# Altium PCB heart.PcbDoc (part 5 of 8)
Units mil, origin at the board's own origin, x right, y up, seen from the top; angles counter-clockwise.
Board outline 5000 x 6000 mil, 2 copper layers (Top Layer, Bottom Layer); 76 components, 43 nets, 328 pads, 50 vias.
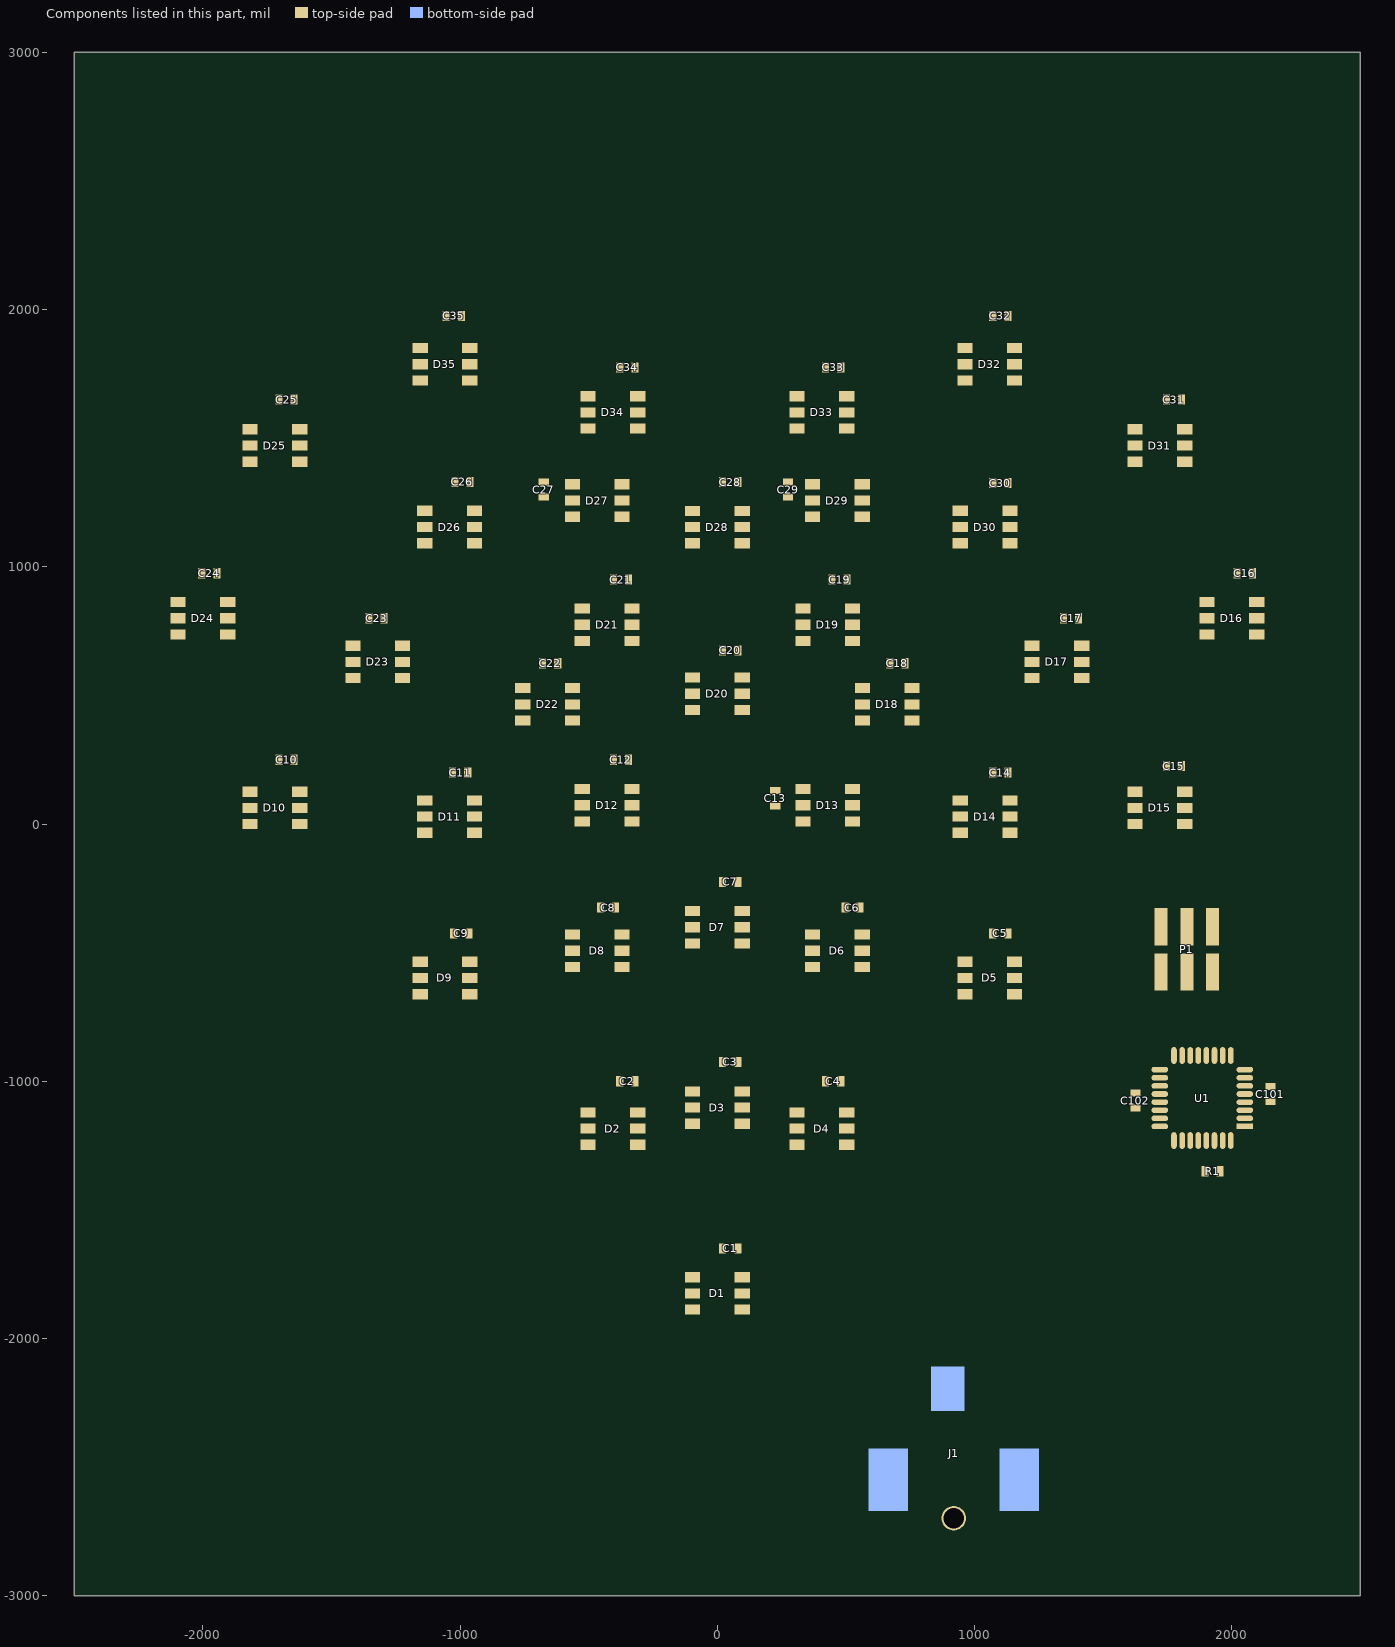
[diagram p5: the components of this part, seen from the top]

## Via types
v1: diameter 48, hole 20, Top Layer to Bottom Layer, 46 vias
v2: diameter 165, hole 150, Top Layer to Bottom Layer, 4 vias

## Nets (pads, with @x,y where several pads share a name; then routed paths per layer and width w, separated by ;. In a path a pad name is that pad's centre, name@x,y a point inside that pad or via, vN(x,y) a via of type N, cw(c..) or ccw(c..) an arc to the next point about the centre after c; other vN are vias at no path point) (continued)
copper on no net: (continued)
  Bottom Layer w2.65: -1566.24,-1541.63 -1462.69,-1541.63 ; -1566.24,-1538.97 -1462.69,-1538.97 ; -1566.24,-1536.32 -1462.69,-1536.32 ; -1566.24,-1408.88 -1486.59,-1408.88 ; -1563.58,-2170.87 -1534.38,-2170.87 ; -1563.58,-2019.53 -1526.41,-2019.53 ; -1563.58,-2016.88 -1526.41,-2016.88 ; -1563.58,-2014.22 -1526.41,-2014.22 ; -1563.58,-2011.57 -1526.41,-2011.57 ; -1563.58,-2008.91 -1529.07,-2008.91 ; -1563.58,-2006.26 -1529.07,-2006.26 ; -1563.58,-2003.6 -1529.07,-2003.6 ; -1563.58,-2000.95 -1529.07,-2000.95 ; -1563.58,-1998.29 -1531.72,-1998.29 ; -1563.58,-1995.64 -1531.72,-1995.64 ; -1563.58,-1804.48 -1462.69,-1804.48 ; -1560.93,-1894.75 -1531.72,-1894.75 ; -1560.93,-1262.85 -1515.79,-1262.85 ; -1558.27,-2173.53 -1529.07,-2173.53 ; -1558.27,-1807.13 -1460.04,-1807.13 ; -1558.27,-1398.26 -1550.31,-1398.26 ; -1555.62,-2069.98 -1518.45,-2069.98 ; -1555.62,-1961.12 -1385.7,-1961.12 ; -1555.62,-1897.4 -1531.72,-1897.4 ; -1555.62,-1809.79 -1460.04,-1809.79 ; -1555.62,-1260.2 -1505.17,-1260.2 ; -1552.96,-2176.18 -1523.76,-2176.18 ; -1552.96,-1900.06 -1531.72,-1900.06 ; -1552.96,-1812.44 -1457.38,-1812.44 ; -1552.96,-1257.54 -1452.07,-1257.54 ; -1550.31,-1815.1 -1457.38,-1815.1 ; -1550.31,-1284.09 -1457.38,-1284.09 ; -1550.31,-1254.89 -1539.69,-1254.89 ; -1547.65,-2178.84 -1515.79,-2178.84 ; -1547.65,-1963.78 -1388.35,-1963.78 ; -1547.65,-1252.23 -1539.69,-1252.23 ; -1545,-2210.7 -1539.69,-2210.7 ; -1545,-2208.04 -1537.03,-2208.04 ; -1545,-2205.39 -1537.03,-2205.39 ; -1545,-2202.73 -1534.38,-2202.73 ; -1545,-2200.08 -1534.38,-2200.08 ; -1545,-2197.42 -1531.72,-2197.42 ; -1545,-2194.77 -1529.07,-2194.77 ; -1545,-2192.11 -1526.41,-2192.11 ; -1545,-2067.32 -1515.79,-2067.32 ; -1545,-1902.71 -1534.38,-1902.71 ; -1545,-1817.75 -1454.73,-1817.75 ; -1545,-1281.44 -1457.38,-1281.44 ; -1545,-1249.58 -1539.69,-1249.58 ; -1545,-1246.92 -1537.03,-1246.92 ; -1545,-1212.41 -1375.08,-1212.41 ; -1542.34,-2216.01 -1539.69,-2216.01 ; -1542.34,-2213.35 -1539.69,-2213.35 ; -1542.34,-2189.46 -1462.69,-2189.46 ; -1542.34,-2186.8 -1457.38,-2186.8 ; -1542.34,-2184.15 -1452.07,-2184.15 ; -1542.34,-2181.49 -1505.17,-2181.49 ; -1542.34,-2064.67 -1510.48,-2064.67 ; -1542.34,-1966.43 -1388.35,-1966.43 ; -1542.34,-1820.41 -1454.73,-1820.41 ; -1542.34,-1406.22 -1486.59,-1406.22 ; -1542.34,-1244.27 -1537.03,-1244.27 ; -1539.69,-2218.66 -1537.03,-2218.66 ; -1539.69,-1969.09 -1391.01,-1969.09 ; -1539.69,-1823.06 -1452.07,-1823.06 ; -1539.69,-1554.9 -1457.38,-1554.9 ; -1539.69,-1384.98 -1531.72,-1384.98 ; -1539.69,-1241.61 -1537.03,-1241.61 ; -1537.03,-2062.01 -1505.17,-2062.01 ; -1537.03,-1825.72 -1452.07,-1825.72 ; -1537.03,-1403.57 -1489.24,-1403.57 ; -1537.03,-1382.33 -1531.72,-1382.33 ; -1537.03,-1278.78 -1460.04,-1278.78 ; -1537.03,-1254.89 -1454.73,-1254.89 ; -1537.03,-1215.06 -1369.77,-1215.06 ; -1534.38,-1971.74 -1391.01,-1971.74 ; -1534.38,-1379.67 -1531.72,-1379.67 ; -1534.38,-1217.72 -1353.84,-1217.72 ; -1531.72,-2059.36 -1494.55,-2059.36 ; -1531.72,-1974.4 -1393.66,-1974.4 ; -1531.72,-1828.37 -1449.42,-1828.37 ; -1531.72,-1400.91 -1489.24,-1400.91 ; -1529.07,-2056.7 -1329.94,-2056.7 ; -1529.07,-1977.05 -1393.66,-1977.05 ; -1529.07,-1831.03 -1446.76,-1831.03 ; -1529.07,-1398.26 -1489.24,-1398.26 ; -1529.07,-1395.6 -1489.24,-1395.6 ; -1529.07,-1276.13 -1462.69,-1276.13 ; -1529.07,-1223.03 -1351.18,-1223.03 ; -1529.07,-1220.37 -1353.84,-1220.37 ; -1526.41,-2115.11 -1513.14,-2115.11 ; -1526.41,-2112.46 -1513.14,-2112.46 ; -1526.41,-2109.8 -1515.79,-2109.8 ; -1526.41,-2107.15 -1515.79,-2107.15 ; -1526.41,-2104.49 -1515.79,-2104.49 ; -1526.41,-2101.84 -1515.79,-2101.84 ; -1526.41,-2099.18 -1513.14,-2099.18 ; -1526.41,-2096.53 -1513.14,-2096.53 ; -1526.41,-2093.87 -1510.48,-2093.87 ; -1526.41,-2054.05 -1319.32,-2054.05 ; -1526.41,-1979.71 -1396.32,-1979.71 ; -1526.41,-1833.68 -1446.76,-1833.68 ; -1526.41,-1392.95 -1489.24,-1392.95 ; -1526.41,-1252.23 -1460.04,-1252.23 ; -1526.41,-1241.61 -1523.76,-1241.61 ; -1526.41,-1238.96 -1513.14,-1238.96 ; -1526.41,-1236.3 -1353.84,-1236.3 ; -1526.41,-1233.65 -1353.84,-1233.65 ; -1526.41,-1230.99 -1351.18,-1230.99 ; -1526.41,-1228.34 -1351.18,-1228.34 ; -1526.41,-1225.68 -1351.18,-1225.68 ; -1523.76,-2120.42 -1510.48,-2120.42 ; -1523.76,-2117.77 -1510.48,-2117.77 ; -1523.76,-2091.22 -1510.48,-2091.22 ; -1523.76,-2088.56 -1507.83,-2088.56 ; -1523.76,-2051.39 -1306.05,-2051.39 ; -1523.76,-1982.36 -1396.32,-1982.36 ; -1523.76,-1836.34 -1444.11,-1836.34 ; -1523.76,-1390.29 -1489.24,-1390.29 ; -1523.76,-1387.64 -1489.24,-1387.64 ; -1521.1,-2123.08 -1505.17,-2123.08 ; -1521.1,-2085.91 -1502.52,-2085.91 ; -1521.1,-2083.25 -1497.21,-2083.25 ; -1521.1,-2048.74 -1290.12,-2048.74 ; -1521.1,-2046.08 -1276.84,-2046.08 ; -1521.1,-1985.02 -1396.32,-1985.02 ; -1521.1,-1273.47 -1468,-1273.47 ; -1518.45,-2231.94 -1441.45,-2231.94 ; -1518.45,-2192.11 -1468,-2192.11 ; -1518.45,-2125.73 -1502.52,-2125.73 ; -1518.45,-2080.6 -1446.76,-2080.6 ; -1518.45,-2043.43 -1268.88,-2043.43 ; -1518.45,-1990.33 -1396.32,-1990.33 ; -1518.45,-1987.67 -1396.32,-1987.67 ; -1518.45,-1838.99 -1444.11,-1838.99 ; -1518.45,-1249.58 -1468,-1249.58 ; -1515.79,-2040.77 -1263.57,-2040.77 ; -1515.79,-2038.12 -1258.26,-2038.12 ; -1515.79,-1995.64 -1396.32,-1995.64 ; -1515.79,-1992.98 -1396.32,-1992.98 ; -1515.79,-1915.99 -1425.52,-1915.99 ; -1515.79,-1841.65 -1441.45,-1841.65 ; -1515.79,-1315.95 -1507.83,-1315.95 ; -1515.79,-1313.3 -1510.48,-1313.3 ; -1515.79,-1310.64 -1513.14,-1310.64 ; -1513.14,-2128.39 -1481.28,-2128.39 ; -1513.14,-2077.94 -1452.07,-2077.94 ; -1513.14,-2035.46 -1252.95,-2035.46 ; -1513.14,-2032.81 -1250.29,-2032.81 ; -1513.14,-2030.15 -1247.64,-2030.15 ; -1513.14,-2027.5 -1244.98,-2027.5 ; -1513.14,-2006.26 -1391.01,-2006.26 ; -1513.14,-2003.6 -1393.66,-2003.6 ; -1513.14,-2000.95 -1393.66,-2000.95 ; -1513.14,-1998.29 -1393.66,-1998.29 ; -1513.14,-1844.3 -1438.8,-1844.3 ; -1513.14,-1557.56 -1457.38,-1557.56 ; -1513.14,-1321.26 -1499.86,-1321.26 ; -1513.14,-1318.61 -1505.17,-1318.61 ; -1510.48,-2131.04 -1486.59,-2131.04 ; -1510.48,-2075.29 -1454.73,-2075.29 ; -1510.48,-2024.84 -1369.77,-2024.84 ; -1510.48,-2022.19 -1375.08,-2022.19 ; -1510.48,-2019.53 -1380.39,-2019.53 ; -1510.48,-2016.88 -1383.04,-2016.88 ; -1510.48,-2014.22 -1385.7,-2014.22 ; -1510.48,-2011.57 -1388.35,-2011.57 ; -1510.48,-2008.91 -1391.01,-2008.91 ; -1510.48,-1913.33 -1430.83,-1913.33 ; -1510.48,-1862.89 -1505.17,-1862.89 ; -1510.48,-1323.92 -1497.21,-1323.92 ; -1510.48,-1270.82 -1473.31,-1270.82 ; -1507.83,-2194.77 -1470.66,-2194.77 ; -1507.83,-2072.63 -1460.04,-2072.63 ; -1507.83,-1910.68 -1436.14,-1910.68 ; -1507.83,-1908.02 -1441.45,-1908.02 ; -1507.83,-1870.85 -1494.55,-1870.85 ; -1507.83,-1868.2 -1499.86,-1868.2 ; -1507.83,-1865.54 -1502.52,-1865.54 ; -1507.83,-1846.96 -1438.8,-1846.96 ; -1507.83,-1329.23 -1446.76,-1329.23 ; -1507.83,-1326.57 -1489.24,-1326.57 ; -1505.17,-2112.46 -1449.42,-2112.46 ; -1505.17,-2109.8 -1452.07,-2109.8 ; -1505.17,-2107.15 -1452.07,-2107.15 ; -1505.17,-2104.49 -1454.73,-2104.49 ; -1505.17,-2101.84 -1457.38,-2101.84 ; -1505.17,-2099.18 -1460.04,-2099.18 ; -1505.17,-1905.37 -1446.76,-1905.37 ; -1505.17,-1902.71 -1449.42,-1902.71 ; -1505.17,-1900.06 -1454.73,-1900.06 ; -1505.17,-1884.13 -1478.62,-1884.13 ; -1505.17,-1881.47 -1481.28,-1881.47 ; -1505.17,-1878.82 -1483.93,-1878.82 ; -1505.17,-1876.16 -1489.24,-1876.16 ; -1505.17,-1873.51 -1491.9,-1873.51 ; -1505.17,-1849.61 -1436.14,-1849.61 ; -1505.17,-1246.92 -1478.62,-1246.92 ; -1502.52,-2197.42 -1470.66,-2197.42 ; -1502.52,-2133.7 -1494.55,-2133.7 ; -1502.52,-2115.11 -1478.62,-2115.11 ; -1502.52,-2096.53 -1462.69,-2096.53 ; -1502.52,-1897.4 -1457.38,-1897.4 ; -1502.52,-1894.75 -1462.69,-1894.75 ; -1502.52,-1892.09 -1465.35,-1892.09 ; -1502.52,-1889.44 -1470.66,-1889.44 ; -1502.52,-1886.78 -1473.31,-1886.78 ; -1502.52,-1852.27 -1433.49,-1852.27 ; -1502.52,-1331.88 -1449.42,-1331.88 ; -1499.86,-2093.87 -1468,-2093.87 ; -1499.86,-2069.98 -1468,-2069.98 ; -1499.86,-1854.92 -1433.49,-1854.92 ; -1499.86,-1334.54 -1452.07,-1334.54 ; -1497.21,-2200.08 -1462.69,-2200.08 ; -1497.21,-2117.77 -1483.93,-2117.77 ; -1497.21,-1560.21 -1454.73,-1560.21 ; -1494.55,-1857.58 -1430.83,-1857.58 ; -1494.55,-1337.19 -1457.38,-1337.19 ; -1491.9,-2202.73 -1454.73,-2202.73 ; -1491.9,-2091.22 -1475.97,-2091.22 ; -1491.9,-1860.23 -1428.18,-1860.23 ; -1491.9,-1432.77 -1475.97,-1432.77 ; -1491.9,-1268.16 -1486.59,-1268.16 ; -1489.24,-1862.89 -1428.18,-1862.89 ; -1489.24,-1663.76 -1462.69,-1663.76 ; -1489.24,-1461.98 -1483.93,-1461.98 ; -1489.24,-1339.85 -1465.35,-1339.85 ; -1486.59,-2205.39 -1446.76,-2205.39 ; -1486.59,-1865.54 -1425.52,-1865.54 ; -1486.59,-1661.11 -1457.38,-1661.11 ; -1486.59,-1562.87 -1454.73,-1562.87 ; -1486.59,-1459.32 -1478.62,-1459.32 ; -1486.59,-1435.43 -1475.97,-1435.43 ; -1483.93,-1456.67 -1475.97,-1456.67 ; -1483.93,-1454.01 -1473.31,-1454.01 ; -1483.93,-1440.74 -1473.31,-1440.74 ; -1483.93,-1438.08 -1473.31,-1438.08 ; -1481.28,-1868.2 -1422.87,-1868.2 ; -1481.28,-1666.42 -1470.66,-1666.42 ; -1481.28,-1602.69 -1457.38,-1602.69 ; -1481.28,-1451.36 -1473.31,-1451.36 ; -1481.28,-1448.7 -1470.66,-1448.7 ; -1481.28,-1446.05 -1470.66,-1446.05 ; -1481.28,-1443.39 -1473.31,-1443.39 ; -1478.62,-2208.04 -1441.45,-2208.04 ; -1478.62,-2181.49 -1449.42,-2181.49 ; -1478.62,-1870.85 -1422.87,-1870.85 ; -1478.62,-1658.45 -1454.73,-1658.45 ; -1478.62,-1565.52 -1452.07,-1565.52 ; -1475.97,-1873.51 -1420.21,-1873.51 ; -1475.97,-1605.35 -1454.73,-1605.35 ; -1475.97,-1260.2 -1446.76,-1260.2 ; -1473.31,-2059.36 -1340.56,-2059.36 ; -1473.31,-1655.8 -1452.07,-1655.8 ; -1473.31,-1608 -1452.07,-1608 ; -1473.31,-1568.18 -1449.42,-1568.18 ; -1473.31,-1472.6 -1436.14,-1472.6 ; -1470.66,-2210.7 -1433.49,-2210.7 ; -1470.66,-2178.84 -1446.76,-2178.84 ; -1470.66,-2083.25 -1444.11,-2083.25 ; -1470.66,-1876.16 -1417.56,-1876.16 ; -1470.66,-1653.14 -1449.42,-1653.14 ; -1470.66,-1610.66 -1452.07,-1610.66 ; -1470.66,-1238.96 -1353.84,-1238.96 ; -1468,-2125.73 -1446.76,-2125.73 ; -1468,-2123.08 -1446.76,-2123.08 ; -1468,-2117.77 -1446.76,-2117.77 ; -1468,-2115.11 -1449.42,-2115.11 ; -1468,-1878.82 -1417.56,-1878.82 ; -1468,-1685 -865.31,-1685 ; -1468,-1650.49 -1446.76,-1650.49 ; -1468,-1613.31 -1449.42,-1613.31 ; -1468,-1469.94 -1436.14,-1469.94 ; -1468,-1403.57 -1401.63,-1403.57 ; -1468,-1400.91 -1404.28,-1400.91 ; -1468,-1398.26 -1404.28,-1398.26 ; -1468,-1395.6 -1404.28,-1395.6 ; -1468,-1392.95 -1404.28,-1392.95 ; -1468,-1326.57 -1444.11,-1326.57 ; -1468,-1262.85 -1444.11,-1262.85 ; -1465.35,-2213.35 -1425.52,-2213.35 ; -1465.35,-2176.18 -1444.11,-2176.18 ; -1465.35,-2120.42 -1446.76,-2120.42 ; -1465.35,-2085.91 -1441.45,-2085.91 ; -1465.35,-1881.47 -1414.9,-1881.47 ; -1465.35,-1647.83 -1446.76,-1647.83 ; -1465.35,-1645.18 -1444.11,-1645.18 ; -1465.35,-1618.62 -1446.76,-1618.62 ; -1465.35,-1615.97 -1446.76,-1615.97 ; -1465.35,-1570.83 -1446.76,-1570.83 ; -1465.35,-1467.29 -1436.14,-1467.29 ; -1465.35,-1411.53 -1396.32,-1411.53 ; -1465.35,-1408.88 -1398.97,-1408.88 ; -1465.35,-1406.22 -1401.63,-1406.22 ; -1465.35,-1390.29 -1404.28,-1390.29 ; -1465.35,-1387.64 -1401.63,-1387.64 ; -1462.69,-2062.01 -1345.87,-2062.01 ; -1462.69,-1642.52 -1444.11,-1642.52 ; -1462.69,-1639.86 -1444.11,-1639.86 ; -1462.69,-1637.21 -1444.11,-1637.21 ; -1462.69,-1634.55 -1444.11,-1634.55 ; -1462.69,-1629.24 -1444.11,-1629.24 ; -1462.69,-1626.59 -1444.11,-1626.59 ; -1462.69,-1623.93 -1444.11,-1623.93 ; -1462.69,-1621.28 -1446.76,-1621.28 ; -1462.69,-1464.63 -1436.14,-1464.63 ; -1462.69,-1416.84 -1380.39,-1416.84 ; -1462.69,-1414.19 -1388.35,-1414.19 ; -1462.69,-1265.51 -1444.11,-1265.51 ; -1462.69,-1241.61 -1356.49,-1241.61 ; -1460.04,-2173.53 -1441.45,-2173.53 ; -1460.04,-2088.56 -1438.8,-2088.56 ; -1460.04,-1884.13 -1412.25,-1884.13 ; -1460.04,-1631.9 -1444.11,-1631.9 ; -1460.04,-1573.49 -1441.45,-1573.49 ; -1460.04,-1461.98 -1436.14,-1461.98 ; -1460.04,-1459.32 -1433.49,-1459.32 ; -1460.04,-1424.81 -1385.7,-1424.81 ; -1460.04,-1422.15 -1383.04,-1422.15 ; -1460.04,-1419.5 -1380.39,-1419.5 ; -1460.04,-1323.92 -1441.45,-1323.92 ; -1460.04,-1268.16 -1441.45,-1268.16 ; -1457.38,-2216.01 -1417.56,-2216.01 ; -1457.38,-2170.87 -1438.8,-2170.87 ; -1457.38,-2064.67 -1351.18,-2064.67 ; -1457.38,-1886.78 -1409.59,-1886.78 ; -1457.38,-1682.35 -854.69,-1682.35 ; -1457.38,-1576.14 -1438.8,-1576.14 ; -1457.38,-1456.67 -1433.49,-1456.67 ; -1457.38,-1454.01 -1433.49,-1454.01 ; -1457.38,-1451.36 -1430.83,-1451.36 ; -1457.38,-1435.43 -1417.56,-1435.43 ; -1457.38,-1432.77 -1412.25,-1432.77 ; -1457.38,-1430.12 -1404.28,-1430.12 ; -1457.38,-1427.46 -1393.66,-1427.46 ; -1457.38,-1321.26 -1438.8,-1321.26 ; -1454.73,-2168.22 -1436.14,-2168.22 ; -1454.73,-2091.22 -1436.14,-2091.22 ; -1454.73,-1743.41 -1053.82,-1743.41 ; -1454.73,-1448.7 -1430.83,-1448.7 ; -1454.73,-1446.05 -1428.18,-1446.05 ; -1454.73,-1443.39 -1425.52,-1443.39 ; -1454.73,-1440.74 -1422.87,-1440.74 ; -1454.73,-1438.08 -1420.21,-1438.08 ; -1454.73,-1318.61 -1438.8,-1318.61 ; -1454.73,-1270.82 -1438.8,-1270.82 ; -1454.73,-1244.27 -1356.49,-1244.27 ; -1452.07,-2165.56 -1433.49,-2165.56 ; -1452.07,-2093.87 -1409.59,-2093.87 ; -1452.07,-2067.32 -1353.84,-2067.32 ; -1452.07,-1889.44 -1409.59,-1889.44 ; -1452.07,-1746.07 -1053.82,-1746.07 ; -1452.07,-1578.8 -1430.83,-1578.8 ; -1452.07,-1315.95 -1436.14,-1315.95 ; -1452.07,-1276.13 -1436.14,-1276.13 ; -1452.07,-1273.47 -1436.14,-1273.47 ; -1452.07,-1246.92 -1359.15,-1246.92 ; -1449.42,-2218.66 -1409.59,-2218.66 ; -1449.42,-2162.91 -1433.49,-2162.91 ; -1449.42,-2096.53 -1404.28,-2096.53 ; -1449.42,-1892.09 -1406.94,-1892.09 ; -1449.42,-1679.69 -846.73,-1679.69 ; -1449.42,-1581.45 -1420.21,-1581.45 ; -1449.42,-1313.3 -1436.14,-1313.3 ; -1449.42,-1310.64 -1433.49,-1310.64 ; -1449.42,-1278.78 -1436.14,-1278.78 ; -1446.76,-2160.25 -1430.83,-2160.25 ; -1446.76,-2099.18 -1401.63,-2099.18 ; -1446.76,-2069.98 -1359.15,-2069.98 ; -1446.76,-1748.72 -1056.47,-1748.72 ; -1446.76,-1677.04 -1314.01,-1677.04 ; -1446.76,-1584.11 -1372.42,-1584.11 ; -1446.76,-1307.99 -1433.49,-1307.99 ; -1446.76,-1305.33 -1433.49,-1305.33 ; -1446.76,-1302.68 -1430.83,-1302.68 ; -1446.76,-1286.75 -1409.59,-1286.75 ; -1446.76,-1284.09 -1430.83,-1284.09 ; -1446.76,-1281.44 -1433.49,-1281.44 ; -1446.76,-1249.58 -1359.15,-1249.58 ; -1444.11,-2221.32 -1401.63,-2221.32 ; -1444.11,-2157.6 -1430.83,-2157.6 ; -1444.11,-2154.94 -1428.18,-2154.94 ; -1444.11,-2104.49 -1420.21,-2104.49 ; -1444.11,-2101.84 -1401.63,-2101.84 ; -1444.11,-2072.63 -1361.8,-2072.63 ; -1444.11,-1894.75 -1404.28,-1894.75 ; -1444.11,-1769.96 -1438.8,-1769.96 ; -1444.11,-1767.31 -1441.45,-1767.31 ; -1444.11,-1751.38 -1056.47,-1751.38 ; -1444.11,-1586.76 -1372.42,-1586.76 ; -1444.11,-1538.97 -1438.8,-1538.97 ; -1444.11,-1536.32 -1438.8,-1536.32 ; -1444.11,-1300.02 -1428.18,-1300.02 ; -1444.11,-1297.37 -1422.87,-1297.37 ; -1444.11,-1294.71 -1417.56,-1294.71 ; -1444.11,-1292.06 -1412.25,-1292.06 ; -1444.11,-1289.4 -1409.59,-1289.4 ; -1444.11,-1252.23 -1361.8,-1252.23 ; -1441.45,-2152.28 -1428.18,-2152.28 ; -1441.45,-2149.63 -1428.18,-2149.63 ; -1441.45,-2109.8 -1425.52,-2109.8 ; -1441.45,-2107.15 -1422.87,-2107.15 ; -1441.45,-1777.93 -1430.83,-1777.93 ; -1441.45,-1775.27 -1433.49,-1775.27 ; -1441.45,-1772.62 -1436.14,-1772.62 ; -1441.45,-1754.03 -1056.47,-1754.03 ; -1441.45,-1674.38 -1329.94,-1674.38 ; -1441.45,-1589.42 -1375.08,-1589.42 ; -1441.45,-1533.66 -1436.14,-1533.66 ; -1441.45,-1531.01 -1436.14,-1531.01 ; -1441.45,-1528.35 -1433.49,-1528.35 ; -1441.45,-1525.7 -1430.83,-1525.7 ; -1441.45,-1523.04 -1425.52,-1523.04 ; -1441.45,-1254.89 -1420.21,-1254.89 ; -1438.8,-2146.97 -1425.52,-2146.97 ; -1438.8,-2144.32 -1425.52,-2144.32 ; -1438.8,-2141.66 -1425.52,-2141.66 ; -1438.8,-2139.01 -1425.52,-2139.01 ; -1438.8,-2120.42 -1422.87,-2120.42 ; -1438.8,-2117.77 -1425.52,-2117.77 ; -1438.8,-2115.11 -1425.52,-2115.11 ; -1438.8,-2112.46 -1425.52,-2112.46 ; -1438.8,-2075.29 -1364.46,-2075.29 ; -1438.8,-1897.4 -1401.63,-1897.4 ; -1438.8,-1783.24 -1422.87,-1783.24 ; -1438.8,-1780.58 -1425.52,-1780.58 ; -1438.8,-1756.69 -1056.47,-1756.69 ; -1438.8,-1671.73 -1335.25,-1671.73 ; -1438.8,-1520.39 -1417.56,-1520.39 ; -1438.8,-1517.73 -1314.01,-1517.73 ; -1438.8,-1257.54 -1422.87,-1257.54 ; -1436.14,-2223.97 -1393.66,-2223.97 ; -1436.14,-2136.35 -1422.87,-2136.35 ; -1436.14,-2133.7 -1422.87,-2133.7 ; -1436.14,-2131.04 -1422.87,-2131.04 ; -1436.14,-2128.39 -1422.87,-2128.39 ; -1436.14,-2125.73 -1422.87,-2125.73 ; -1436.14,-2123.08 -1422.87,-2123.08 ; -1436.14,-2077.94 -1367.11,-2077.94 ; -1436.14,-1900.06 -1401.63,-1900.06 ; -1436.14,-1791.2 -1412.25,-1791.2 ; -1436.14,-1788.55 -1417.56,-1788.55 ; -1436.14,-1785.89 -1420.21,-1785.89 ; -1436.14,-1669.07 -1340.56,-1669.07 ; -1436.14,-1594.73 -1375.08,-1594.73 ; -1436.14,-1592.07 -1375.08,-1592.07 ; -1436.14,-1515.08 -1316.67,-1515.08 ; -1436.14,-1260.2 -1422.87,-1260.2 ; -1433.49,-2080.6 -1369.77,-2080.6 ; -1433.49,-1796.51 -1406.94,-1796.51 ; -1433.49,-1793.86 -1409.59,-1793.86 ; -1433.49,-1759.34 -1205.16,-1759.34 ; -1433.49,-1666.42 -1345.87,-1666.42 ; -1433.49,-1597.38 -1377.73,-1597.38 ; -1433.49,-1512.42 -1319.32,-1512.42 ; -1433.49,-1262.85 -1422.87,-1262.85 ; -1430.83,-1902.71 -1398.97,-1902.71 ; -1430.83,-1801.82 -1398.97,-1801.82 ; -1430.83,-1799.17 -1404.28,-1799.17 ; -1430.83,-1762 -1290.12,-1762 ; -1430.83,-1663.76 -1351.18,-1663.76 ; -1430.83,-1661.11 -1353.84,-1661.11 ; -1430.83,-1602.69 -1377.73,-1602.69 ; -1430.83,-1600.04 -1377.73,-1600.04 ; -1430.83,-1509.77 -1321.98,-1509.77 ; -1430.83,-1268.16 -1417.56,-1268.16 ; -1430.83,-1265.51 -1420.21,-1265.51 ; -1428.18,-2226.63 -1383.04,-2226.63 ; -1428.18,-1807.13 -1393.66,-1807.13 ; -1428.18,-1804.48 -1396.32,-1804.48 ; -1428.18,-1764.65 -1292.77,-1764.65 ; -1428.18,-1658.45 -1356.49,-1658.45 ; -1428.18,-1608 -1377.73,-1608 ; -1428.18,-1605.35 -1377.73,-1605.35 ; -1428.18,-1273.47 -1417.56,-1273.47 ; -1428.18,-1270.82 -1417.56,-1270.82 ; -1425.52,-2229.28 -1372.42,-2229.28 ; -1425.52,-2091.22 -1417.56,-2091.22 ; -1425.52,-1905.37 -1396.32,-1905.37 ; -1425.52,-1812.44 -1388.35,-1812.44 ; -1425.52,-1809.79 -1391.01,-1809.79 ; -1425.52,-1767.31 -1295.43,-1767.31 ; -1425.52,-1655.8 -1359.15,-1655.8 ; -1425.52,-1653.14 -1361.8,-1653.14 ; -1425.52,-1650.49 -1364.46,-1650.49 ; -1425.52,-1613.31 -1377.73,-1613.31 ; -1425.52,-1610.66 -1377.73,-1610.66 ; -1425.52,-1507.11 -1327.29,-1507.11 ; -1422.87,-1817.75 -1380.39,-1817.75 ; -1422.87,-1815.1 -1383.04,-1815.1 ; -1422.87,-1647.83 -1364.46,-1647.83 ; -1422.87,-1645.18 -1367.11,-1645.18 ; -1422.87,-1642.52 -1367.11,-1642.52 ; -1422.87,-1639.86 -1369.77,-1639.86 ; -1422.87,-1637.21 -1369.77,-1637.21 ; -1422.87,-1634.55 -1372.42,-1634.55 ; -1422.87,-1631.9 -1372.42,-1631.9 ; -1422.87,-1629.24 -1372.42,-1629.24 ; -1422.87,-1626.59 -1375.08,-1626.59 ; -1422.87,-1623.93 -1375.08,-1623.93 ; -1422.87,-1621.28 -1375.08,-1621.28 ; -1422.87,-1618.62 -1375.08,-1618.62 ; -1422.87,-1615.97 -1377.73,-1615.97 ; -1420.21,-2231.94 -1319.32,-2231.94 ; -1420.21,-1823.06 -1375.08,-1823.06 ; -1420.21,-1820.41 -1377.73,-1820.41 ; -1420.21,-1769.96 -1295.43,-1769.96 ; -1420.21,-1504.46 -1329.94,-1504.46 ; -1417.56,-2234.59 -1409.59,-2234.59 ; -1417.56,-1908.02 -1393.66,-1908.02 ; -1417.56,-1828.37 -1367.11,-1828.37 ; -1417.56,-1825.72 -1369.77,-1825.72 ; -1417.56,-1772.62 -1298.08,-1772.62 ; -1417.56,-1475.25 -1409.59,-1475.25 ; -1417.56,-1472.6 -1401.63,-1472.6 ; -1417.56,-1469.94 -1393.66,-1469.94 ; -1417.56,-1467.29 -1388.35,-1467.29 ; -1417.56,-1464.63 -1383.04,-1464.63 ; -1417.56,-1461.98 -1380.39,-1461.98 ; -1414.9,-2277.07 -1266.22,-2277.07 ; -1414.9,-2237.25 -1406.94,-2237.25 ; -1414.9,-2125.73 -1404.28,-2125.73 ; -1414.9,-2123.08 -1404.28,-2123.08 ; -1414.9,-2120.42 -1406.94,-2120.42 ; -1414.9,-2117.77 -1406.94,-2117.77 ; -1414.9,-2115.11 -1409.59,-2115.11 ; -1414.9,-2112.46 -1412.25,-2112.46 ; -1414.9,-1831.03 -1364.46,-1831.03 ; -1414.9,-1775.27 -1298.08,-1775.27 ; -1414.9,-1459.32 -1377.73,-1459.32 ; -1414.9,-1456.67 -1375.08,-1456.67 ; -1414.9,-1284.09 -1406.94,-1284.09 ; -1414.9,-1254.89 -1361.8,-1254.89 ; -1412.25,-2242.56 -1406.94,-2242.56 ; -1412.25,-2239.9 -1406.94,-2239.9 ; -1412.25,-1910.68 -1391.01,-1910.68 ; -1412.25,-1836.34 -1356.49,-1836.34 ; -1412.25,-1833.68 -1361.8,-1833.68 ; -1412.25,-1777.93 -1295.43,-1777.93 ; -1412.25,-1454.01 -1375.08,-1454.01 ; -1409.59,-2245.21 -1404.28,-2245.21 ; -1409.59,-2083.25 -1372.42,-2083.25 ; -1409.59,-1841.65 -1351.18,-1841.65 ; -1409.59,-1838.99 -1353.84,-1838.99 ; -1409.59,-1780.58 -1295.43,-1780.58 ; -1409.59,-1581.45 -1369.77,-1581.45 ; -1409.59,-1501.8 -1332.6,-1501.8 ; -1409.59,-1451.36 -1375.08,-1451.36 ; -1409.59,-1281.44 -1406.94,-1281.44 ; -1409.59,-1278.78 -1406.94,-1278.78 ; -1409.59,-1276.13 -1406.94,-1276.13 ; -1409.59,-1257.54 -1364.46,-1257.54 ; -1406.94,-2250.52 -1404.28,-2250.52 ; -1406.94,-2247.87 -1404.28,-2247.87 ; -1406.94,-2104.49 -1398.97,-2104.49 ; -1406.94,-1844.3 -1348.53,-1844.3 ; -1406.94,-1260.2 -1364.46,-1260.2 ; -1404.28,-2274.42 -1260.91,-2274.42 ; -1404.28,-2234.59 -1324.63,-2234.59 ; -1404.28,-2107.15 -1398.97,-2107.15 ; -1404.28,-2085.91 -1375.08,-2085.91 ; -1404.28,-1849.61 -1340.56,-1849.61 ; -1404.28,-1846.96 -1345.87,-1846.96 ; -1404.28,-1783.24 -1292.77,-1783.24 ; -1404.28,-1520.39 -1311.36,-1520.39 ; -1404.28,-1448.7 -1375.08,-1448.7 ; -1404.28,-1262.85 -1364.46,-1262.85 ; -1401.63,-2271.76 -1244.98,-2271.76 ; -1401.63,-2109.8 -1398.97,-2109.8 ; -1401.63,-2088.56 -1375.08,-2088.56 ; -1401.63,-1913.33 -1391.01,-1913.33 ; -1401.63,-1852.27 -1337.91,-1852.27 ; -1401.63,-1785.89 -1290.12,-1785.89 ; -1401.63,-1499.15 -1335.25,-1499.15 ; -1401.63,-1265.51 -1364.46,-1265.51 ; -1398.97,-2269.11 -1242.33,-2269.11 ; -1398.97,-2091.22 -1377.73,-2091.22 ; -1398.97,-1857.58 -1343.22,-1857.58 ; -1398.97,-1854.92 -1335.25,-1854.92 ; -1398.97,-1788.55 -1290.12,-1788.55 ; -1398.97,-1578.8 -1367.11,-1578.8 ; -1398.97,-1273.47 -1367.11,-1273.47 ; -1398.97,-1270.82 -1367.11,-1270.82 ; -1398.97,-1268.16 -1367.11,-1268.16 ; -1396.32,-2266.45 -1242.33,-2266.45 ; -1396.32,-2263.8 -1242.33,-2263.8 ; -1396.32,-2237.25 -1327.29,-2237.25 ; -1396.32,-2093.87 -1377.73,-2093.87 ; -1396.32,-1860.23 -1345.87,-1860.23 ; -1396.32,-1791.2 -1287.46,-1791.2 ; -1396.32,-1576.14 -1364.46,-1576.14 ; -1396.32,-1523.04 -1306.05,-1523.04 ; -1396.32,-1446.05 -1375.08,-1446.05 ; -1396.32,-1284.09 -1367.11,-1284.09 ; -1396.32,-1281.44 -1367.11,-1281.44 ; -1396.32,-1278.78 -1367.11,-1278.78 ; -1396.32,-1276.13 -1367.11,-1276.13 ; -1393.66,-2261.14 -1242.33,-2261.14 ; -1393.66,-2258.49 -1242.33,-2258.49 ; -1393.66,-2255.83 -1242.33,-2255.83 ; -1393.66,-2253.18 -1244.98,-2253.18 ; -1393.66,-2250.52 -1380.39,-2250.52 ; -1393.66,-2247.87 -1391.01,-2247.87 ; -1393.66,-2099.18 -1380.39,-2099.18 ; -1393.66,-2096.53 -1380.39,-2096.53 ; -1393.66,-1865.54 -1351.18,-1865.54 ; -1393.66,-1862.89 -1348.53,-1862.89 ; -1393.66,-1793.86 -1284.81,-1793.86 ; -1393.66,-1525.7 -1303.39,-1525.7 ; -1391.01,-2125.73 -1385.7,-2125.73 ; -1391.01,-2123.08 -1385.7,-2123.08 ; -1391.01,-2109.8 -1383.04,-2109.8 ; -1391.01,-2107.15 -1383.04,-2107.15 ; -1391.01,-2104.49 -1383.04,-2104.49 ; -1391.01,-2101.84 -1383.04,-2101.84 ; -1391.01,-1868.2 -1351.18,-1868.2 ; -1391.01,-1573.49 -1361.8,-1573.49 ; -1391.01,-1496.49 -1340.56,-1496.49 ; -1388.35,-2120.42 -1385.7,-2120.42 ; -1388.35,-2117.77 -1385.7,-2117.77 ; -1388.35,-2115.11 -1385.7,-2115.11 ; -1388.35,-2112.46 -1385.7,-2112.46 ; -1388.35,-1873.51 -1353.84,-1873.51 ; -1388.35,-1870.85 -1353.84,-1870.85 ; -1388.35,-1796.51 -1282.15,-1796.51 ; -1388.35,-1570.83 -1356.49,-1570.83 ; -1388.35,-1531.01 -1298.08,-1531.01 ; -1388.35,-1528.35 -1300.74,-1528.35 ; -1388.35,-1443.39 -1377.73,-1443.39 ; -1385.7,-2239.9 -1335.25,-2239.9 ; -1385.7,-1876.16 -1356.49,-1876.16 ; -1385.7,-1799.17 -1279.5,-1799.17 ; -1385.7,-1568.18 -1351.18,-1568.18 ; -1385.7,-1565.52 -1271.53,-1565.52 ; -1385.7,-1533.66 -1295.43,-1533.66 ; -1383.04,-2178.84 -1380.39,-2178.84 ; -1383.04,-2176.18 -1377.73,-2176.18 ; -1383.04,-2173.53 -1375.08,-2173.53 ; -1383.04,-1923.95 -1356.49,-1923.95 ; -1383.04,-1878.82 -1356.49,-1878.82 ; -1383.04,-1801.82 -1279.5,-1801.82 ; -1383.04,-1562.87 -1274.19,-1562.87 ; -1383.04,-1560.21 -1276.84,-1560.21 ; -1383.04,-1538.97 -1290.12,-1538.97 ; -1383.04,-1536.32 -1292.77,-1536.32 ; -1383.04,-1493.84 -1343.22,-1493.84 ; -1383.04,-1414.19 -1380.39,-1414.19 ; -1380.39,-2170.87 -1372.42,-2170.87 ; -1380.39,-2168.22 -1367.11,-2168.22 ; -1380.39,-1881.47 -1356.49,-1881.47 ; -1380.39,-1804.48 -1276.84,-1804.48 ; -1380.39,-1557.56 -1276.84,-1557.56 ; -1380.39,-1554.9 -1279.5,-1554.9 ; -1380.39,-1552.25 -1279.5,-1552.25 ; -1380.39,-1549.59 -1282.15,-1549.59 ; -1380.39,-1546.94 -1284.81,-1546.94 ; -1380.39,-1544.28 -1287.46,-1544.28 ; -1380.39,-1541.63 -1287.46,-1541.63 ; -1380.39,-1440.74 -1377.73,-1440.74 ; -1377.73,-2165.56 -1364.46,-2165.56 ; -1377.73,-2162.91 -1356.49,-2162.91 ; -1377.73,-1884.13 -1359.15,-1884.13 ; -1377.73,-1807.13 -1274.19,-1807.13 ; -1377.73,-1491.18 -1345.87,-1491.18 ; -1375.08,-2160.25 -1314.01,-2160.25 ; -1375.08,-1886.78 -1359.15,-1886.78 ; -1372.42,-2242.56 -1345.87,-2242.56 ; -1372.42,-2157.6 -1316.67,-2157.6 ; -1372.42,-1889.44 -1361.8,-1889.44 ; -1372.42,-1809.79 -1271.53,-1809.79 ; -1372.42,-1488.53 -1348.53,-1488.53 ; -1369.77,-1892.09 -1361.8,-1892.09 ; -1369.77,-1812.44 -1268.88,-1812.44 ; -1367.11,-2154.94 -1319.32,-2154.94 ; -1367.11,-1894.75 -1361.8,-1894.75 ; -1367.11,-1815.1 -1268.88,-1815.1 ; -1367.11,-1485.87 -1351.18,-1485.87 ; -1364.46,-1817.75 -1266.22,-1817.75 ; -1364.46,-1483.22 -1353.84,-1483.22 ; -1361.8,-2152.28 -1324.63,-2152.28 ; -1361.8,-1480.56 -1356.49,-1480.56 ; -1359.15,-1820.41 -1263.57,-1820.41 ; -1359.15,-1286.75 -1345.87,-1286.75 ; -1359.15,-1284.09 -1345.87,-1284.09 ; -1359.15,-1281.44 -1345.87,-1281.44 ; -1356.49,-2149.63 -1332.6,-2149.63 ; -1356.49,-1823.06 -1260.91,-1823.06 ; -1356.49,-1297.37 -1343.22,-1297.37 ; -1356.49,-1294.71 -1343.22,-1294.71 ; -1356.49,-1292.06 -1343.22,-1292.06 ; -1356.49,-1289.4 -1343.22,-1289.4 ; -1356.49,-1278.78 -1345.87,-1278.78 ; -1356.49,-1276.13 -1345.87,-1276.13 ; -1356.49,-1273.47 -1343.22,-1273.47 ; -1356.49,-1270.82 -1343.22,-1270.82 ; -1356.49,-1268.16 -1343.22,-1268.16 ; -1356.49,-1265.51 -1343.22,-1265.51 ; -1356.49,-1262.85 -1340.56,-1262.85 ; -1353.84,-1908.02 -1343.22,-1908.02 ; -1353.84,-1905.37 -1337.91,-1905.37 ; -1353.84,-1902.71 -1335.25,-1902.71 ; -1353.84,-1900.06 -1335.25,-1900.06 ; -1353.84,-1825.72 -1258.26,-1825.72 ; -1353.84,-1305.33 -1337.91,-1305.33 ; -1353.84,-1302.68 -1340.56,-1302.68 ; -1353.84,-1300.02 -1340.56,-1300.02 ; -1353.84,-1260.2 -1340.56,-1260.2 ; -1353.84,-1257.54 -1337.91,-1257.54 ; -1353.84,-1254.89 -1337.91,-1254.89 ; -1351.18,-2125.73 -1138.78,-2125.73 ; -1351.18,-2123.08 -1138.78,-2123.08 ; -1351.18,-2120.42 -1138.78,-2120.42 ; -1351.18,-2117.77 -1141.44,-2117.77 ; -1351.18,-2115.11 -1146.75,-2115.11 ; -1351.18,-2112.46 -1149.4,-2112.46 ; -1351.18,-1923.95 -1221.09,-1923.95 ; -1351.18,-1897.4 -1332.6,-1897.4 ; -1351.18,-1894.75 -1332.6,-1894.75 ; -1351.18,-1828.37 -1255.6,-1828.37 ; -1351.18,-1310.64 -1335.25,-1310.64 ; -1351.18,-1307.99 -1337.91,-1307.99 ; -1351.18,-1252.23 -1335.25,-1252.23 ; -1351.18,-1249.58 -1335.25,-1249.58 ; -1348.53,-2109.8 -1157.37,-2109.8 ; -1348.53,-2107.15 -1167.99,-2107.15 ; -1348.53,-2104.49 -1170.64,-2104.49 ; -1348.53,-1892.09 -1329.94,-1892.09 ; -1348.53,-1889.44 -1329.94,-1889.44 ; -1348.53,-1886.78 -1327.29,-1886.78 ; -1348.53,-1831.03 -1252.95,-1831.03 ; -1348.53,-1315.95 -1332.6,-1315.95 ; -1348.53,-1313.3 -1335.25,-1313.3 ; -1348.53,-1246.92 -1332.6,-1246.92 ; -1345.87,-2229.28 -1316.67,-2229.28 ; -1345.87,-2101.84 -1175.95,-2101.84 ; -1345.87,-1884.13 -1327.29,-1884.13 ; -1345.87,-1881.47 -1327.29,-1881.47 ; -1345.87,-1878.82 -1327.29,-1878.82 ; -1345.87,-1321.26 -1327.29,-1321.26 ; -1345.87,-1318.61 -1329.94,-1318.61 ; -1345.87,-1244.27 -1329.94,-1244.27 ; -1345.87,-1241.61 -1327.29,-1241.61 ; -1345.87,-1215.06 -1337.91,-1215.06 ; -1345.87,-1212.41 -1340.56,-1212.41 ; -1343.22,-2099.18 -1178.61,-2099.18 ; -1343.22,-1950.5 -1106.92,-1950.5 ; -1343.22,-1876.16 -1327.29,-1876.16 ; -1343.22,-1873.51 -1327.29,-1873.51 ; -1343.22,-1833.68 -1252.95,-1833.68 ; -1343.22,-1448.7 -1295.43,-1448.7 ; -1343.22,-1446.05 -1292.77,-1446.05 ; -1343.22,-1443.39 -1290.12,-1443.39 ; -1343.22,-1392.95 -1194.54,-1392.95 ; -1343.22,-1390.29 -1197.19,-1390.29 ; -1343.22,-1387.64 -1197.19,-1387.64 ; -1343.22,-1323.92 -1324.63,-1323.92 ; -1343.22,-1238.96 -1324.63,-1238.96 ; -1343.22,-1230.99 -1308.7,-1230.99 ; -1343.22,-1228.34 -1298.08,-1228.34 ; -1343.22,-1225.68 -1268.88,-1225.68 ; -1343.22,-1223.03 -1329.94,-1223.03 ; -1343.22,-1220.37 -1332.6,-1220.37 ; -1343.22,-1217.72 -1335.25,-1217.72 ; -1343.22,-1201.79 -913.1,-1201.79 ; -1340.56,-2096.53 -1181.26,-2096.53 ; -1340.56,-1870.85 -1327.29,-1870.85 ; -1340.56,-1836.34 -1250.29,-1836.34 ; -1340.56,-1647.83 -1287.46,-1647.83 ; -1340.56,-1451.36 -1298.08,-1451.36 ; -1340.56,-1440.74 -1287.46,-1440.74 ; -1340.56,-1438.08 -1284.81,-1438.08 ; -1340.56,-1435.43 -1282.15,-1435.43 ; -1340.56,-1432.77 -1279.5,-1432.77 ; -1340.56,-1430.12 -1274.19,-1430.12 ; -1340.56,-1427.46 -1271.53,-1427.46 ; -1340.56,-1424.81 -1268.88,-1424.81 ; -1340.56,-1422.15 -1260.91,-1422.15 ; -1340.56,-1419.5 -1178.61,-1419.5 ; -1340.56,-1416.84 -1181.26,-1416.84 ; -1340.56,-1414.19 -1183.92,-1414.19 ; -1340.56,-1411.53 -1186.57,-1411.53 ; -1340.56,-1408.88 -1189.23,-1408.88 ; -1340.56,-1406.22 -1189.23,-1406.22 ; -1340.56,-1403.57 -1191.88,-1403.57 ; -1340.56,-1400.91 -1194.54,-1400.91 ; -1340.56,-1398.26 -1194.54,-1398.26 ; -1340.56,-1395.6 -1194.54,-1395.6 ; -1340.56,-1326.57 -1321.98,-1326.57 ; -1340.56,-1236.3 -1319.32,-1236.3 ; -1337.91,-2250.52 -1244.98,-2250.52 ; -1337.91,-2093.87 -1181.26,-2093.87 ; -1337.91,-1953.16 -1106.92,-1953.16 ; -1337.91,-1921.3 -1234.36,-1921.3 ; -1337.91,-1868.2 -1329.94,-1868.2 ; -1337.91,-1838.99 -1247.64,-1838.99 ; -1337.91,-1454.01 -1300.74,-1454.01 ; -1337.91,-1329.23 -1316.67,-1329.23 ; -1337.91,-1233.65 -1314.01,-1233.65 ; -1335.25,-2226.63 -1314.01,-2226.63 ; -1335.25,-2162.91 -1311.36,-2162.91 ; -1335.25,-2091.22 -1183.92,-2091.22 ; -1335.25,-2024.84 -1244.98,-2024.84 ; -1335.25,-1955.81 -1106.92,-1955.81 ; -1335.25,-1841.65 -1244.98,-1841.65 ; -1335.25,-1650.49 -1290.12,-1650.49 ; -1335.25,-1331.88 -1311.36,-1331.88 ; -1335.25,-1284.09 -1215.78,-1284.09 ; -1335.25,-1281.44 -1213.12,-1281.44 ; -1335.25,-1278.78 -1213.12,-1278.78 ; -1335.25,-1276.13 -1213.12,-1276.13 ; -1335.25,-1273.47 -1210.47,-1273.47 ; -1335.25,-1270.82 -1210.47,-1270.82 ; -1335.25,-1204.44 -915.76,-1204.44 ; -1332.6,-2003.6 -1329.94,-2003.6 ; -1332.6,-1958.47 -1106.92,-1958.47 ; -1332.6,-1918.64 -1242.33,-1918.64 ; -1332.6,-1844.3 -1242.33,-1844.3 ; -1332.6,-1456.67 -1306.05,-1456.67 ; -1332.6,-1334.54 -1306.05,-1334.54 ; -1332.6,-1268.16 -1207.81,-1268.16 ; -1332.6,-1265.51 -1207.81,-1265.51 ; -1332.6,-1262.85 -1205.16,-1262.85 ; -1332.6,-1207.1 -921.07,-1207.1 ; -1329.94,-2247.87 -1244.98,-2247.87 ; -1329.94,-2223.97 -1311.36,-2223.97 ; -1329.94,-2165.56 -1308.7,-2165.56 ; -1329.94,-2088.56 -1183.92,-2088.56 ; -1329.94,-2022.19 -1242.33,-2022.19 ; -1329.94,-2000.95 -1324.63,-2000.95 ; -1329.94,-1961.12 -1106.92,-1961.12 ; -1329.94,-1915.99 -1247.64,-1915.99 ; -1329.94,-1653.14 -1298.08,-1653.14 ; -1329.94,-1645.18 -1282.15,-1645.18 ; -1329.94,-1260.2 -1199.85,-1260.2 ; -1329.94,-1257.54 -1191.88,-1257.54 ; -1329.94,-1209.75 -1308.7,-1209.75 ; -1327.29,-2221.32 -1308.7,-2221.32 ; -1327.29,-1998.29 -1319.32,-1998.29 ; -1327.29,-1995.64 -1316.67,-1995.64 ; -1327.29,-1966.43 -1189.23,-1966.43 ; -1327.29,-1963.78 -1106.92,-1963.78 ; -1327.29,-1913.33 -1252.95,-1913.33 ; -1327.29,-1846.96 -1239.67,-1846.96 ; -1327.29,-1337.19 -1282.15,-1337.19 ; -1327.29,-1254.89 -1093.65,-1254.89 ; -1327.29,-1212.41 -1319.32,-1212.41 ; -1324.63,-2245.21 -1247.64,-2245.21 ; -1324.63,-2218.66 -1306.05,-2218.66 ; -1324.63,-2168.22 -1306.05,-2168.22 ; -1324.63,-2085.91 -1186.57,-2085.91 ; -1324.63,-1992.98 -1311.36,-1992.98 ; -1324.63,-1990.33 -1306.05,-1990.33 ; -1324.63,-1987.67 -1303.39,-1987.67 ; -1324.63,-1985.02 -1298.08,-1985.02 ; -1324.63,-1974.4 -1210.47,-1974.4 ; -1324.63,-1971.74 -1205.16,-1971.74 ; -1324.63,-1969.09 -1199.85,-1969.09 ; -1324.63,-1910.68 -1260.91,-1910.68 ; -1324.63,-1908.02 -1263.57,-1908.02 ; -1324.63,-1849.61 -1237.02,-1849.61 ; -1324.63,-1568.18 -1271.53,-1568.18 ; -1324.63,-1459.32 -1314.01,-1459.32 ; -1324.63,-1339.85 -1234.36,-1339.85 ; -1324.63,-1252.23 -1088.34,-1252.23 ; -1321.98,-2216.01 -1306.05,-2216.01 ; -1321.98,-2170.87 -1306.05,-2170.87 ; -1321.98,-2019.53 -1242.33,-2019.53 ; -1321.98,-1982.36 -1292.77,-1982.36 ; -1321.98,-1979.71 -1287.46,-1979.71 ; -1321.98,-1977.05 -1279.5,-1977.05 ; -1321.98,-1905.37 -1268.88,-1905.37 ; -1321.98,-1852.27 -1237.02,-1852.27 ; -1321.98,-1642.52 -1279.5,-1642.52 ; -1321.98,-1249.58 -1085.68,-1249.58 ; -1321.98,-1223.03 -1274.19,-1223.03 ; -1319.32,-2242.56 -1247.64,-2242.56 ; -1319.32,-2213.35 -1303.39,-2213.35 ; -1319.32,-2173.53 -1303.39,-2173.53 ; -1319.32,-1902.71 -1274.19,-1902.71 ; -1319.32,-1900.06 -1276.84,-1900.06 ; -1319.32,-1897.4 -1282.15,-1897.4 ; -1319.32,-1894.75 -1284.81,-1894.75 ; -1319.32,-1854.92 -1234.36,-1854.92 ; -1319.32,-1655.8 -1308.7,-1655.8 ; -1319.32,-1570.83 -1268.88,-1570.83 ; -1319.32,-1477.91 -1242.33,-1477.91 ; -1319.32,-1342.5 -1237.02,-1342.5 ; -1319.32,-1246.92 -1083.03,-1246.92 ; -1316.67,-2210.7 -1303.39,-2210.7 ; -1316.67,-2208.04 -1300.74,-2208.04 ; -1316.67,-2178.84 -1300.74,-2178.84 ; -1316.67,-2176.18 -1303.39,-2176.18 ; -1316.67,-2083.25 -1186.57,-2083.25 ; -1316.67,-2016.88 -1242.33,-2016.88 ; -1316.67,-1892.09 -1287.46,-1892.09 ; -1316.67,-1889.44 -1292.77,-1889.44 ; -1316.67,-1886.78 -1295.43,-1886.78 ; -1316.67,-1884.13 -1300.74,-1884.13 ; -1316.67,-1881.47 -1303.39,-1881.47 ; -1316.67,-1878.82 -1306.05,-1878.82 ; -1316.67,-1876.16 -1308.7,-1876.16 ; -1316.67,-1873.51 -1314.01,-1873.51 ; -1316.67,-1639.86 -1276.84,-1639.86 ; -1316.67,-1480.56 -1242.33,-1480.56 ; -1314.01,-2239.9 -1250.29,-2239.9 ; -1314.01,-2205.39 -1300.74,-2205.39 ; -1314.01,-2202.73 -1276.84,-2202.73 ; -1314.01,-2200.08 -1276.84,-2200.08 ; -1314.01,-2189.46 -1295.43,-2189.46 ; -1314.01,-2186.8 -1298.08,-2186.8 ; -1314.01,-2184.15 -1300.74,-2184.15 ; -1314.01,-2181.49 -1300.74,-2181.49 ; -1314.01,-1857.58 -1231.71,-1857.58 ; -1314.01,-1637.21 -1274.19,-1637.21 ; -1314.01,-1573.49 -1268.88,-1573.49 ; -1314.01,-1483.22 -1239.67,-1483.22 ; -1314.01,-1345.16 -1237.02,-1345.16 ; -1314.01,-1244.27 -1258.26,-1244.27 ; -1314.01,-1220.37 -1279.5,-1220.37 ; -1311.36,-2237.25 -1252.95,-2237.25 ; -1311.36,-2197.42 -1279.5,-2197.42 ; -1311.36,-2194.77 -1284.81,-2194.77 ; -1311.36,-2192.11 -1290.12,-2192.11 ; -1311.36,-2014.22 -1242.33,-2014.22 ; -1311.36,-1860.23 -1229.05,-1860.23 ; -1311.36,-1576.14 -1268.88,-1576.14 ; -1311.36,-1485.87 -1239.67,-1485.87 ; -1311.36,-1241.61 -1266.22,-1241.61 ; -1308.7,-2234.59 -1287.46,-2234.59 ; -1308.7,-2011.57 -1242.33,-2011.57 ; -1308.7,-1862.89 -1226.4,-1862.89 ; -1308.7,-1634.55 -1274.19,-1634.55 ; -1308.7,-1578.8 -1268.88,-1578.8 ; -1308.7,-1347.81 -1237.02,-1347.81 ; -1306.05,-2231.94 -1290.12,-2231.94 ; -1306.05,-2080.6 -1186.57,-2080.6 ; -1306.05,-1865.54 -1226.4,-1865.54 ; -1306.05,-1677.04 -841.42,-1677.04 ; -1306.05,-1631.9 -1271.53,-1631.9 ; -1306.05,-1629.24 -1271.53,-1629.24 ; -1306.05,-1581.45 -1266.22,-1581.45 ; -1306.05,-1488.53 -1234.36,-1488.53 ; -1303.39,-2008.91 -1242.33,-2008.91 ; -1303.39,-1626.59 -1268.88,-1626.59 ; -1303.39,-1623.93 -1268.88,-1623.93 ; -1303.39,-1586.76 -1266.22,-1586.76 ; -1303.39,-1584.11 -1266.22,-1584.11 ; -1303.39,-1491.18 -1229.05,-1491.18 ; -1303.39,-1475.25 -1242.33,-1475.25 ; -1303.39,-1238.96 -1274.19,-1238.96 ; -1300.74,-1868.2 -1223.74,-1868.2 ; -1300.74,-1621.28 -1266.22,-1621.28 ; -1300.74,-1618.62 -1266.22,-1618.62 ; -1300.74,-1594.73 -1263.57,-1594.73 ; -1300.74,-1592.07 -1263.57,-1592.07 ; -1300.74,-1589.42 -1266.22,-1589.42 ; -1300.74,-1493.84 -1061.78,-1493.84 ; -1298.08,-2006.26 -1244.98,-2006.26 ; -1298.08,-1870.85 -1221.09,-1870.85 ; -1298.08,-1615.97 -1266.22,-1615.97 ; -1298.08,-1613.31 -1266.22,-1613.31 ; -1298.08,-1610.66 -1266.22,-1610.66 ; -1298.08,-1608 -1263.57,-1608 ; -1298.08,-1605.35 -1263.57,-1605.35 ; -1298.08,-1602.69 -1263.57,-1602.69 ; -1298.08,-1600.04 -1263.57,-1600.04 ; -1298.08,-1597.38 -1263.57,-1597.38 ; -1298.08,-1496.49 -1167.99,-1496.49 ; -1298.08,-1472.6 -1242.33,-1472.6 ; -1298.08,-1350.47 -1266.22,-1350.47 ; -1298.08,-1334.54 -1282.15,-1334.54 ; -1295.43,-1873.51 -1218.43,-1873.51 ; -1295.43,-1331.88 -1282.15,-1331.88 ; -1295.43,-1329.23 -1282.15,-1329.23 ; -1292.77,-2077.94 -1186.57,-2077.94 ; -1292.77,-2003.6 -1244.98,-2003.6 ; -1292.77,-1499.15 -1181.26,-1499.15 ; -1292.77,-1469.94 -1242.33,-1469.94 ; -1292.77,-1326.57 -1282.15,-1326.57 ; -1290.12,-1876.16 -1218.43,-1876.16 ; -1290.12,-1674.38 -836.11,-1674.38 ; -1290.12,-1501.8 -1189.23,-1501.8 ; -1290.12,-1323.92 -1282.15,-1323.92 ; -1290.12,-1321.26 -1282.15,-1321.26 ; -1290.12,-1318.61 -1282.15,-1318.61 ; -1290.12,-1315.95 -1284.81,-1315.95 ; -1290.12,-1313.3 -1284.81,-1313.3 ; -1290.12,-1310.64 -1287.46,-1310.64 ; -1287.46,-2000.95 -1247.64,-2000.95 ; -1287.46,-1878.82 -1215.78,-1878.82 ; -1287.46,-1504.46 -1194.54,-1504.46 ; -1287.46,-1467.29 -1242.33,-1467.29 ; -1284.81,-1881.47 -1213.12,-1881.47 ; -1284.81,-1507.11 -1199.85,-1507.11 ; -1284.81,-1464.63 -1242.33,-1464.63 ; -1284.81,-1209.75 -926.38,-1209.75 ; -1282.15,-2234.59 -1252.95,-2234.59 ; -1282.15,-2205.39 -1274.19,-2205.39 ; -1282.15,-2075.29 -1186.57,-2075.29 ; -1282.15,-1998.29 -1252.95,-1998.29 ; -1282.15,-1762 -1207.81,-1762 ; -1282.15,-1671.73 -833.45,-1671.73 ; -1282.15,-1509.77 -1202.5,-1509.77 ; -1282.15,-1461.98 -1239.67,-1461.98 ; -1279.5,-2208.04 -1274.19,-2208.04 ; -1279.5,-1884.13 -1213.12,-1884.13 ; -1279.5,-1512.42 -1205.16,-1512.42 ; -1279.5,-1459.32 -1237.02,-1459.32 ; -1279.5,-1228.34 -1266.22,-1228.34 ; -1276.84,-2231.94 -1252.95,-2231.94 ; -1276.84,-2213.35 -1274.19,-2213.35 ; -1276.84,-2210.7 -1274.19,-2210.7 ; -1276.84,-1886.78 -1210.47,-1886.78 ; -1276.84,-1764.65 -1210.47,-1764.65 ; -1276.84,-1669.07 -830.8,-1669.07 ; -1276.84,-1515.08 -1205.16,-1515.08 ; -1276.84,-1456.67 -1234.36,-1456.67 ; -1274.19,-1889.44 -1207.81,-1889.44 ; -1274.19,-1767.31 -1210.47,-1767.31 ; -1274.19,-1666.42 -828.14,-1666.42 ; -1274.19,-1517.73 -1207.81,-1517.73 ; -1274.19,-1454.01 -1218.43,-1454.01 ; -1274.19,-1212.41 -1083.03,-1212.41 ; -1271.53,-2072.63 -1186.57,-2072.63 ; -1271.53,-1769.96 -1210.47,-1769.96 ; -1271.53,-1520.39 -1207.81,-1520.39 ; -1271.53,-1451.36 -1218.43,-1451.36 ; -1268.88,-1995.64 -1260.91,-1995.64 ; -1268.88,-1892.09 -1207.81,-1892.09 ; -1268.88,-1772.62 -1210.47,-1772.62 ; -1268.88,-1663.76 -825.49,-1663.76 ; -1268.88,-1525.7 -1210.47,-1525.7 ; -1268.88,-1523.04 -1210.47,-1523.04 ; -1268.88,-1448.7 -1221.09,-1448.7 ; -1268.88,-1230.99 -1260.91,-1230.99 ; -1268.88,-1215.06 -1088.34,-1215.06 ; -1266.22,-1894.75 -1205.16,-1894.75 ; -1266.22,-1775.27 -1210.47,-1775.27 ; -1266.22,-1661.11 -825.49,-1661.11 ; -1266.22,-1528.35 -1210.47,-1528.35 ; -1266.22,-1446.05 -1223.74,-1446.05 ; -1266.22,-1337.19 -1229.05,-1337.19 ; -1266.22,-1217.72 -1088.34,-1217.72 ; -1263.57,-2069.98 -1183.92,-2069.98 ; -1263.57,-1777.93 -1207.81,-1777.93 ; -1263.57,-1658.45 -825.49,-1658.45 ; -1263.57,-1531.01 -1210.47,-1531.01 ; -1263.57,-1443.39 -1226.4,-1443.39 ; -1260.91,-1897.4 -1205.16,-1897.4 ; -1260.91,-1780.58 -1205.16,-1780.58 ; -1260.91,-1655.8 -825.49,-1655.8 ; -1260.91,-1533.66 -1210.47,-1533.66 ; -1260.91,-1440.74 -1229.05,-1440.74 ; -1260.91,-1220.37 -1088.34,-1220.37 ; -1258.26,-1900.06 -1202.5,-1900.06 ; -1258.26,-1783.24 -1205.16,-1783.24 ; -1258.26,-1653.14 -825.49,-1653.14 ; -1258.26,-1538.97 -1210.47,-1538.97 ; -1258.26,-1536.32 -1210.47,-1536.32 ; -1258.26,-1223.03 -1083.03,-1223.03 ; -1255.6,-2067.32 -1183.92,-2067.32 ; -1255.6,-1785.89 -1202.5,-1785.89 ; -1255.6,-1650.49 -1067.09,-1650.49 ; -1255.6,-1544.28 -1210.47,-1544.28 ; -1255.6,-1541.63 -1210.47,-1541.63 ; -1255.6,-1438.08 -1234.36,-1438.08 ; -1255.6,-1334.54 -1223.74,-1334.54 ; -1255.6,-1225.68 -1075.06,-1225.68 ; -1252.95,-1788.55 -1199.85,-1788.55 ; -1252.95,-1647.83 -1085.68,-1647.83 ; -1252.95,-1645.18 -1093.65,-1645.18 ; -1252.95,-1549.59 -1207.81,-1549.59 ; -1252.95,-1546.94 -1207.81,-1546.94 ; -1252.95,-1228.34 -1072.4,-1228.34 ; -1250.29,-2064.67 -1183.92,-2064.67 ; -1250.29,-1902.71 -1202.5,-1902.71 ; -1250.29,-1791.2 -1199.85,-1791.2 ; -1250.29,-1642.52 -1098.96,-1642.52 ; -1250.29,-1554.9 -1205.16,-1554.9 ; -1250.29,-1552.25 -1205.16,-1552.25 ; -1250.29,-1350.47 -1234.36,-1350.47 ; -1250.29,-1331.88 -1221.09,-1331.88 ; -1250.29,-1230.99 -1072.4,-1230.99 ; -1247.64,-2223.97 -1231.71,-2223.97 ; -1247.64,-2221.32 -1234.36,-2221.32 ; -1247.64,-2218.66 -1234.36,-2218.66 ; -1247.64,-2216.01 -1234.36,-2216.01 ; -1247.64,-2213.35 -1234.36,-2213.35 ; -1247.64,-2210.7 -1234.36,-2210.7 ; -1247.64,-2208.04 -1234.36,-2208.04 ; -1247.64,-2205.39 -1234.36,-2205.39 ; -1247.64,-2202.73 -1234.36,-2202.73 ; -1247.64,-2200.08 -1234.36,-2200.08 ; -1247.64,-2197.42 -1234.36,-2197.42 ; -1247.64,-2194.77 -1231.71,-2194.77 ; -1247.64,-2062.01 -1181.26,-2062.01 ; -1247.64,-1977.05 -1215.78,-1977.05 ; -1247.64,-1793.86 -1197.19,-1793.86 ; -1247.64,-1639.86 -1106.92,-1639.86 ; -1247.64,-1637.21 -1112.23,-1637.21 ; -1247.64,-1560.21 -1202.5,-1560.21 ; -1247.64,-1557.56 -1202.5,-1557.56 ; -1247.64,-1353.12 -1234.36,-1353.12 ; -1247.64,-1244.27 -1080.37,-1244.27 ; -1247.64,-1241.61 -1077.71,-1241.61 ; -1247.64,-1238.96 -1077.71,-1238.96 ; -1247.64,-1236.3 -1075.06,-1236.3 ; -1247.64,-1233.65 -1072.4,-1233.65 ; -1244.98,-2231.94 -1229.05,-2231.94 ; -1244.98,-2229.28 -1231.71,-2229.28 ; -1244.98,-2226.63 -1231.71,-2226.63 ; -1244.98,-2192.11 -1231.71,-2192.11 ; -1244.98,-2189.46 -1231.71,-2189.46 ; -1244.98,-2186.8 -1229.05,-2186.8 ; -1244.98,-2184.15 -1229.05,-2184.15 ; -1244.98,-1905.37 -1202.5,-1905.37 ; -1244.98,-1796.51 -1194.54,-1796.51 ; -1244.98,-1634.55 -1117.54,-1634.55 ; -1244.98,-1631.9 -1120.2,-1631.9 ; -1244.98,-1629.24 -1125.51,-1629.24 ; -1244.98,-1568.18 -1197.19,-1568.18 ; -1244.98,-1565.52 -1199.85,-1565.52 ; -1244.98,-1562.87 -1199.85,-1562.87 ; -1242.33,-2237.25 -1226.4,-2237.25 ; -1242.33,-2234.59 -1229.05,-2234.59 ; -1242.33,-2181.49 -1226.4,-2181.49 ; -1242.33,-2178.84 -1226.4,-2178.84 ; -1242.33,-2059.36 -1178.61,-2059.36 ; -1242.33,-1979.71 -1218.43,-1979.71 ; -1242.33,-1799.17 -1191.88,-1799.17 ; -1242.33,-1626.59 -1130.82,-1626.59 ; -1242.33,-1623.93 -1133.47,-1623.93 ; -1242.33,-1621.28 -1138.78,-1621.28 ; -1242.33,-1576.14 -1189.23,-1576.14 ; -1242.33,-1573.49 -1191.88,-1573.49 ; -1242.33,-1570.83 -1194.54,-1570.83 ; -1242.33,-1355.78 -1234.36,-1355.78 ; -1242.33,-1329.23 -1215.78,-1329.23 ; -1239.67,-2242.56 -1221.09,-2242.56 ; -1239.67,-2239.9 -1223.74,-2239.9 ; -1239.67,-2176.18 -1223.74,-2176.18 ; -1239.67,-2056.7 -1175.95,-2056.7 ; -1239.67,-1801.82 -1191.88,-1801.82 ; -1239.67,-1618.62 -1141.44,-1618.62 ; -1239.67,-1615.97 -1144.09,-1615.97 ; -1239.67,-1613.31 -1149.4,-1613.31 ; -1239.67,-1610.66 -1152.06,-1610.66 ; -1239.67,-1608 -1154.71,-1608 ; -1239.67,-1605.35 -1160.02,-1605.35 ; -1239.67,-1602.69 -1162.68,-1602.69 ; -1239.67,-1600.04 -1165.33,-1600.04 ; -1239.67,-1597.38 -1167.99,-1597.38 ; -1239.67,-1594.73 -1170.64,-1594.73 ; -1239.67,-1592.07 -1175.95,-1592.07 ; -1239.67,-1589.42 -1178.61,-1589.42 ; -1239.67,-1586.76 -1181.26,-1586.76 ; -1239.67,-1584.11 -1183.92,-1584.11 ; -1239.67,-1581.45 -1186.57,-1581.45 ; -1239.67,-1578.8 -1189.23,-1578.8 ; -1239.67,-1361.09 -1234.36,-1361.09 ; -1239.67,-1358.43 -1234.36,-1358.43 ; -1237.02,-2277.07 -1231.71,-2277.07 ; -1237.02,-2245.21 -1218.43,-2245.21 ; -1237.02,-2173.53 -1221.09,-2173.53 ; -1237.02,-2170.87 -1221.09,-2170.87 ; -1237.02,-2054.05 -1173.3,-2054.05 ; -1237.02,-1982.36 -1223.74,-1982.36 ; -1237.02,-1908.02 -1202.5,-1908.02 ; -1237.02,-1804.48 -1189.23,-1804.48 ; -1237.02,-1363.74 -1234.36,-1363.74 ; -1237.02,-1326.57 -1210.47,-1326.57 ; -1234.36,-2274.42 -1226.4,-2274.42 ; -1234.36,-2271.76 -1223.74,-2271.76 ; -1234.36,-2269.11 -1221.09,-2269.11 ; -1234.36,-2266.45 -1221.09,-2266.45 ; -1234.36,-2263.8 -1160.02,-2263.8 ; -1234.36,-2261.14 -1186.57,-2261.14 ; -1234.36,-2258.49 -1199.85,-2258.49 ; -1234.36,-2247.87 -1215.78,-2247.87 ; -1234.36,-2168.22 -1218.43,-2168.22 ; -1234.36,-2051.39 -1165.33,-2051.39 ; -1234.36,-1985.02 -1226.4,-1985.02 ; -1234.36,-1807.13 -1186.57,-1807.13 ; -1234.36,-1422.15 -1175.95,-1422.15 ; -1234.36,-1323.92 -1205.16,-1323.92 ; -1231.71,-2287.69 -790.97,-2287.69 ; -1231.71,-2253.18 -1210.47,-2253.18 ; -1231.71,-2250.52 -1213.12,-2250.52 ; -1231.71,-2165.56 -1215.78,-2165.56 ; -1231.71,-2048.74 -865.31,-2048.74 ; -1231.71,-1809.79 -1183.92,-1809.79 ; -1229.05,-2255.83 -1205.16,-2255.83 ; -1229.05,-2162.91 -1210.47,-2162.91 ; -1229.05,-2160.25 -1207.81,-2160.25 ; -1229.05,-2046.08 -862.66,-2046.08 ; -1229.05,-1910.68 -1205.16,-1910.68 ; -1229.05,-1812.44 -1181.26,-1812.44 ; -1229.05,-1321.26 -1199.85,-1321.26 ; -1226.4,-2285.04 -796.28,-2285.04 ; -1226.4,-2157.6 -1202.5,-2157.6 ; -1226.4,-2043.43 -860,-2043.43 ; -1226.4,-2040.77 -860,-2040.77 ; -1226.4,-1815.1 -1178.61,-1815.1 ; -1226.4,-1424.81 -1170.64,-1424.81 ; -1223.74,-2282.38 -798.94,-2282.38 ; -1223.74,-2038.12 -857.35,-2038.12 ; -1223.74,-2035.46 -854.69,-2035.46 ; -1223.74,-1817.75 -1178.61,-1817.75 ; -1223.74,-1318.61 -1194.54,-1318.61 ; -1221.09,-2154.94 -1194.54,-2154.94 ; -1221.09,-2032.81 -852.04,-2032.81 ; -1221.09,-2030.15 -849.38,-2030.15 ; -1221.09,-2027.5 -846.73,-2027.5 ; -1221.09,-2024.84 -844.07,-2024.84 ; -1221.09,-1913.33 -1210.47,-1913.33 ; -1221.09,-1820.41 -1175.95,-1820.41 ; -1221.09,-1491.18 -1064.44,-1491.18 ; -1221.09,-1427.46 -1165.33,-1427.46 ; -1218.43,-2279.73 -1197.19,-2279.73 ; -1218.43,-2231.94 -1083.03,-2231.94 ; -1218.43,-2152.28 -1173.3,-2152.28 ; -1218.43,-2022.19 -841.42,-2022.19 ; -1218.43,-2019.53 -838.76,-2019.53 ; -1218.43,-2016.88 -836.11,-2016.88 ; -1218.43,-2014.22 -899.83,-2014.22 ; -1218.43,-2011.57 -907.79,-2011.57 ; -1218.43,-2008.91 -910.45,-2008.91 ; -1218.43,-1825.72 -1170.64,-1825.72 ; -1218.43,-1823.06 -1173.3,-1823.06 ; -1218.43,-1430.12 -1154.71,-1430.12 ; -1218.43,-1315.95 -1189.23,-1315.95 ; -1215.78,-2277.07 -1207.81,-2277.07 ; -1215.78,-2237.25 -979.48,-2237.25 ; -1215.78,-2234.59 -984.79,-2234.59 ; -1215.78,-2149.63 -1125.51,-2149.63 ; -1215.78,-2006.26 -915.76,-2006.26 ; -1215.78,-1828.37 -1167.99,-1828.37 ; -1215.78,-1488.53 -1069.75,-1488.53 ; -1215.78,-1432.77 -1067.09,-1432.77 ; -1213.12,-2003.6 -1090.99,-2003.6 ; -1213.12,-1831.03 -1165.33,-1831.03 ; -1213.12,-1435.43 -1069.75,-1435.43 ; -1213.12,-1313.3 -1183.92,-1313.3 ; -1210.47,-2266.45 -1165.33,-2266.45 ; -1210.47,-2239.9 -976.82,-2239.9 ; -1210.47,-2146.97 -1128.16,-2146.97 ; -1210.47,-2000.95 -1104.27,-2000.95 ; -1210.47,-1833.68 -1162.68,-1833.68 ; -1210.47,-1485.87 -1069.75,-1485.87 ; -1210.47,-1440.74 -1072.4,-1440.74 ; -1210.47,-1438.08 -1072.4,-1438.08 ; -1207.81,-2242.56 -974.17,-2242.56 ; -1207.81,-1998.29 -1112.23,-1998.29 ; -1207.81,-1836.34 -1160.02,-1836.34 ; -1207.81,-1483.22 -1072.4,-1483.22 ; -1207.81,-1480.56 -1075.06,-1480.56 ; -1207.81,-1477.91 -1075.06,-1477.91 ; -1207.81,-1446.05 -1075.06,-1446.05 ; -1207.81,-1443.39 -1075.06,-1443.39 ; -1207.81,-1310.64 -1175.95,-1310.64 ; -1205.16,-2269.11 -1170.64,-2269.11 ; -1205.16,-2245.21 -1149.4,-2245.21 ; -1205.16,-2144.32 -1128.16,-2144.32 ; -1205.16,-1995.64 -1120.2,-1995.64 ; -1205.16,-1838.99 -1157.37,-1838.99 ; -1205.16,-1475.25 -1077.71,-1475.25 ; -1205.16,-1472.6 -1077.71,-1472.6 ; -1205.16,-1469.94 -1077.71,-1469.94 ; -1205.16,-1467.29 -1077.71,-1467.29 ; -1205.16,-1464.63 -1080.37,-1464.63 ; -1205.16,-1461.98 -1080.37,-1461.98 ; -1205.16,-1456.67 -1077.71,-1456.67 ; -1205.16,-1454.01 -1077.71,-1454.01 ; -1205.16,-1451.36 -1077.71,-1451.36 ; -1205.16,-1448.7 -1077.71,-1448.7 ; -1205.16,-1297.37 -1186.57,-1297.37 ; -1205.16,-1294.71 -1189.23,-1294.71 ; -1205.16,-1292.06 -1191.88,-1292.06